# EAGLE board Proiect TSC v103 (EAGLE 9.7.0)
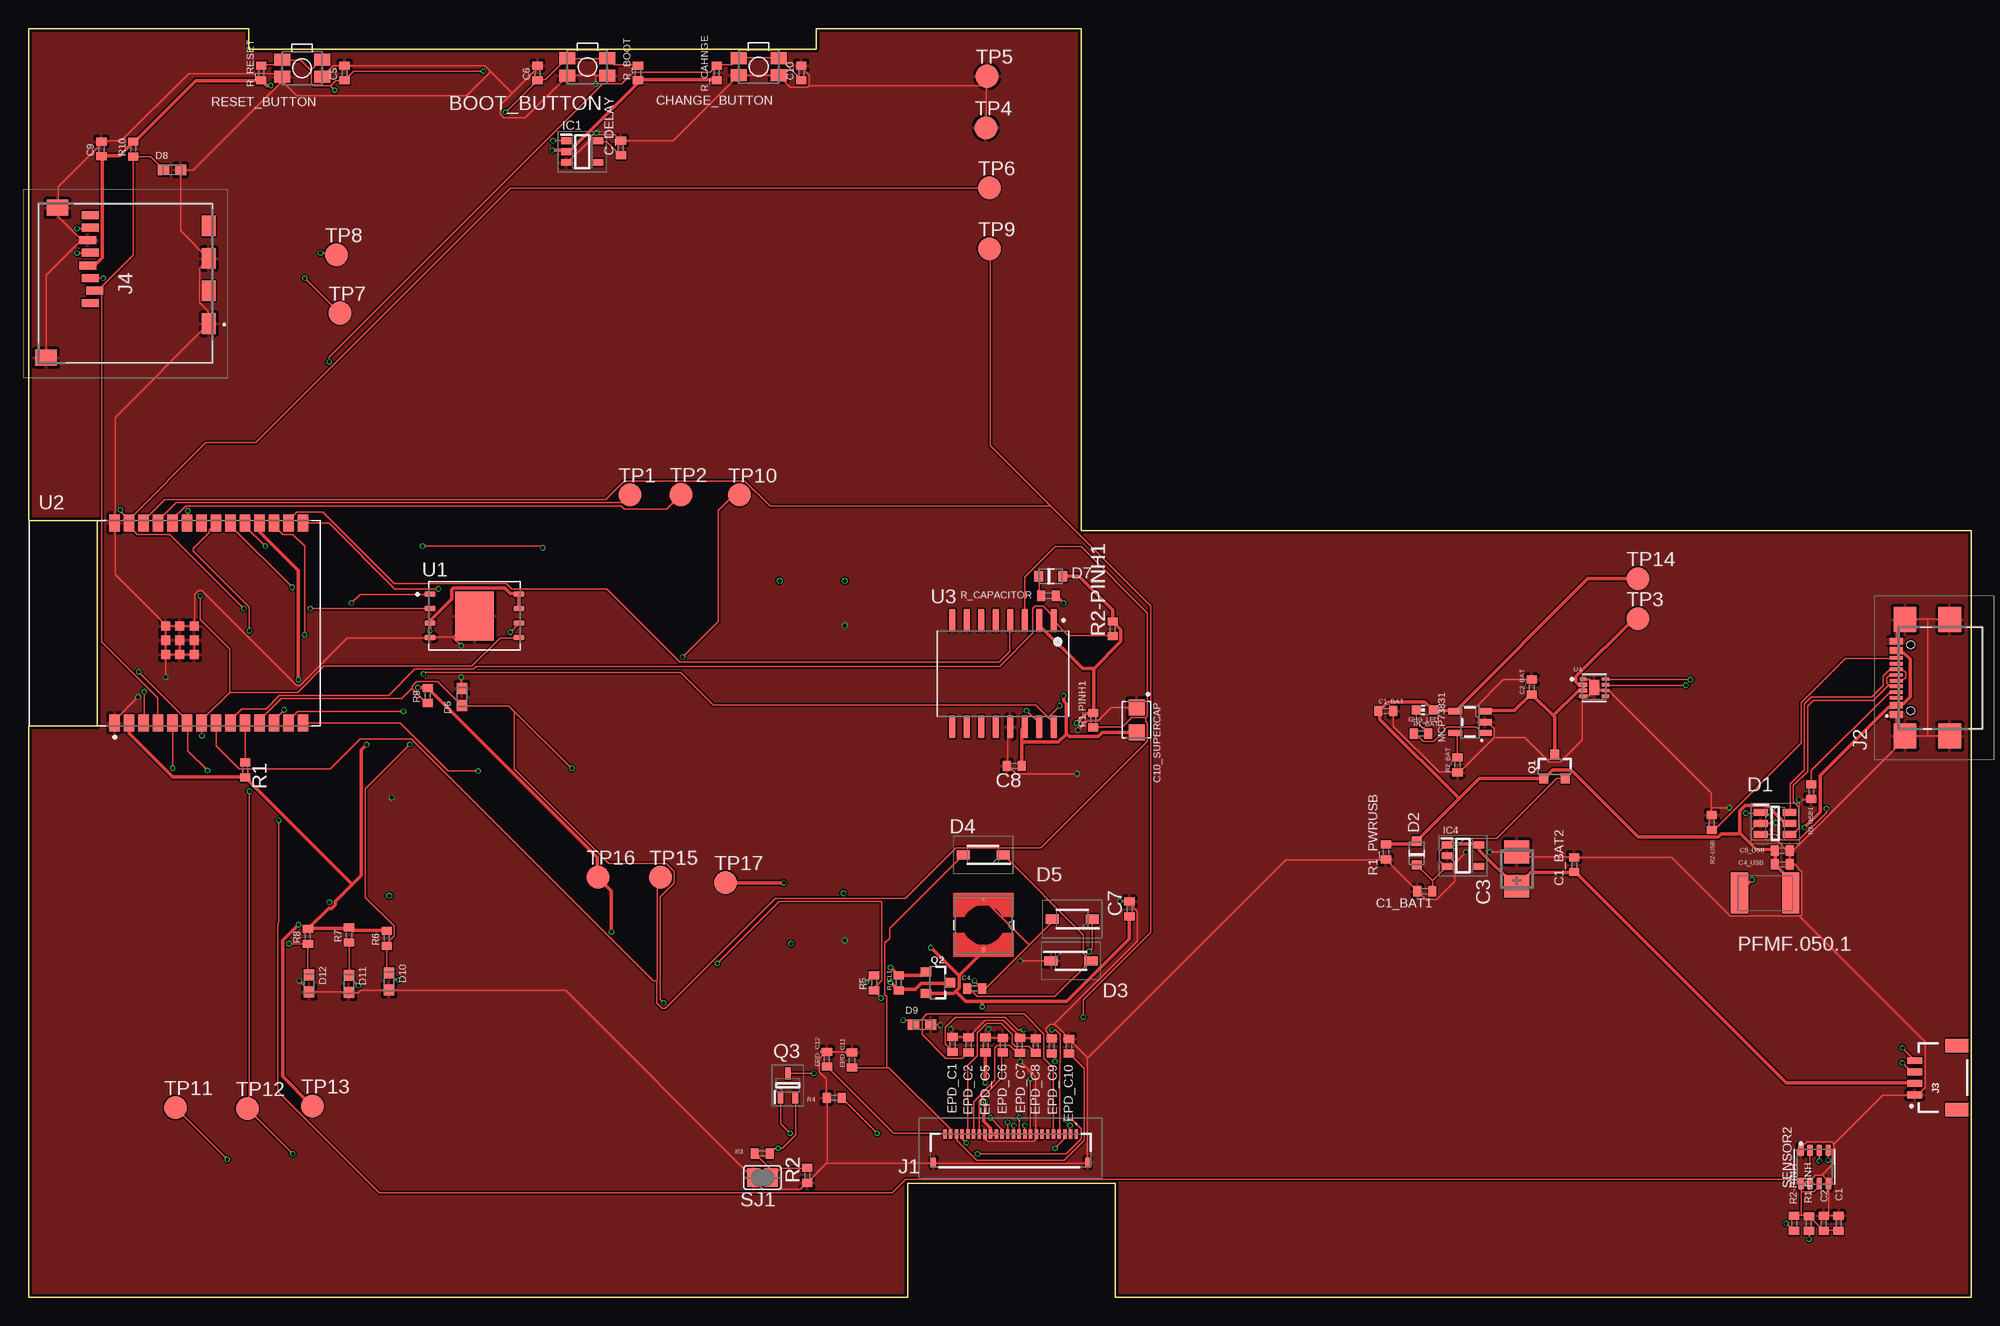
[diagram p0: board, top side]
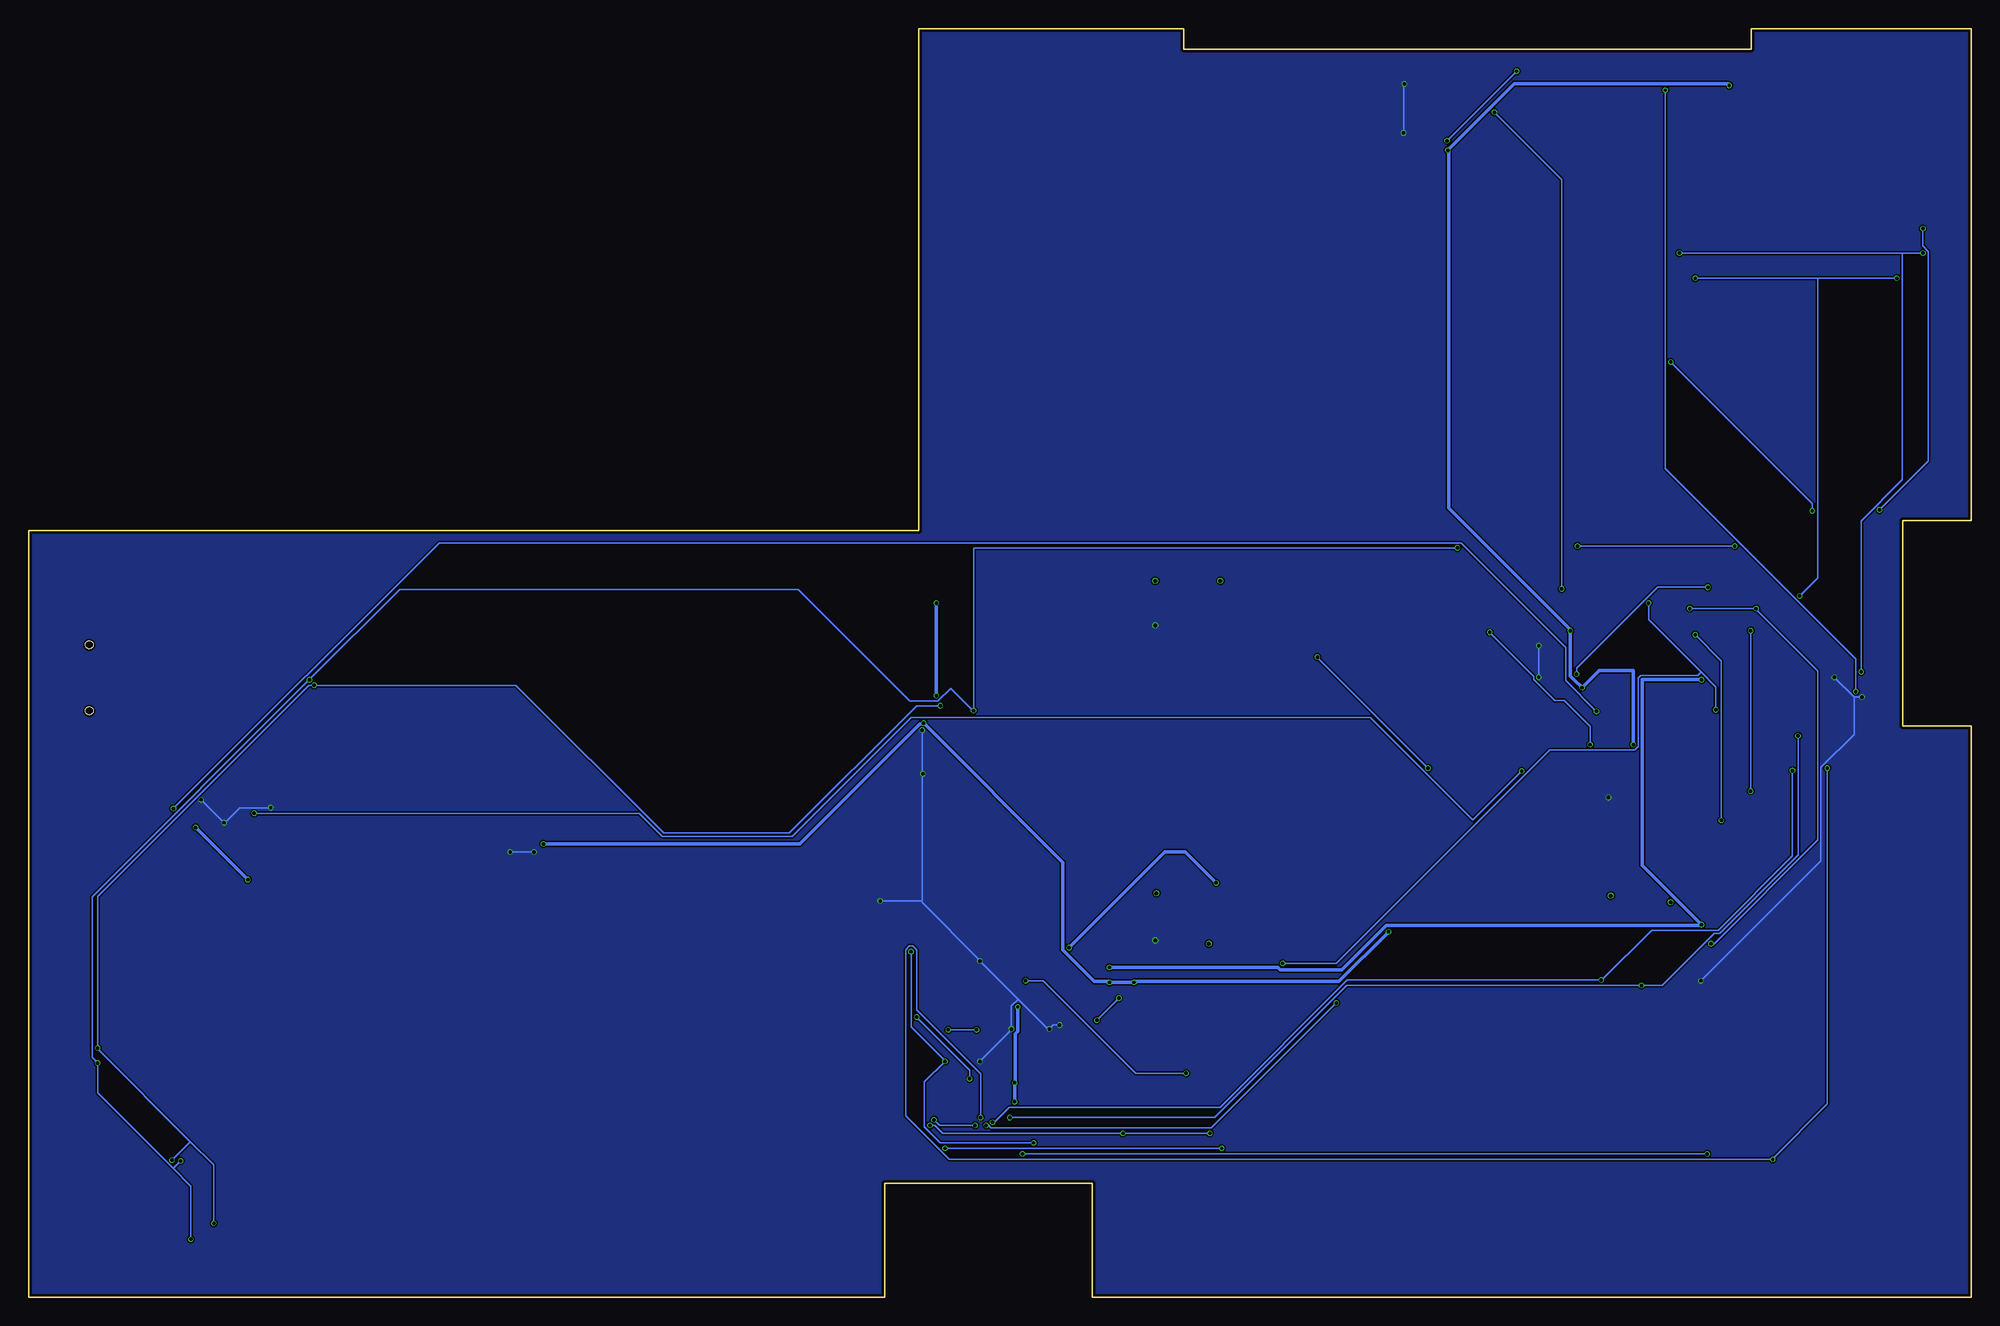
[diagram p1: board, bottom side, seen from below]

Size 170.2 x 111.2 mm. Coordinates in mm from the lower left corner, seen from the top.
Outline: 92.2,111.2 92.2,67.2 170.2,67.2 170.2,0 95.2,0 95.2,10 77,10 77,0 0,0 0,50.1 6,50.1 6,68.1 0,68.1 0,111.2 19.3,111.2 19.3,109.4 69,109.4 69,111.2 92.2,111.2
Copper layers (1*16): Top 0.035mm / dielectric 1.6mm / Bottom 0.035mm
Design rules "jlcpcb-2layers.dru": minimum track width 5mil, minimum drill 0.3mm, track to track 5mil, track to pad 5mil, pad to pad 5mil, via to via 5mil, smd to smd 5mil, copper to edge 0.2mm, drill to drill 6mil, minimum pad ring 10mil, minimum via ring 3mil, stop-mask expansion 4mil, vias tented up to drill 0mil, thermal gap 10mil
Net classes: 0 default: width 0.15 mm; 1 power: width 0.3 mm

## Footprints (pad centres in the part's own frame; a part is rotated, then mirrored left to right if it is on the bottom)
MYBUTTON = smd 1.4 x 1.05: 1 1.75,0.75; 2 -1.75,0.75; 3 -1.75,-0.75; 4 1.75,-0.75
EAGLE-LTSPICE_C0402 = smd 0.7 x 0.9: 1 -0.65,0; 2 0.65,0
ESP32_WROVER_EAGLE-LTSPICE_C0402 = smd 0.7 x 0.9: 1 -0.65,0; 2 0.65,0
RCL_CT3528 = smd 2 x 2.2: + -1.5,0; - 1.5,0
CAPCP3225X100N = smd 1.4 x 1.4: 1 -1.1,0; 2 1.1,0
SOT95P280X145-6N = smd 1.2 x 0.6: 1 -1.25,0.95; 2 -1.25,0; 3 -1.25,-0.95; 4 1.25,-0.95; 5 1.25,0; 6 1.25,0.95
ESP32_WROVER_AVX---SD0805S020S1R0_AVX_SD0805S020S1R0_0 = smd 0.8 x 0.9: 1 -1.05,0; 2 1.05,0
SOD3716X135N = smd 1.15 x 0.8: 1 -1.75,0; 2 1.75,0
DIOC1608X36N = smd 0.97 x 0.94: 1 -0.75,0; 2 0.75,0
ADAFRUIT_CHIP-LED0603 = smd 0.8 x 0.8: A 0,-0.75; C 0,0.75
SOT95P280X125-5N = smd 0.9 x 0.6: 1 -1.4,0.95; 2 -1.4,0; 3 -1.4,-0.95; 4 1.4,-0.95; 5 1.4,0.95
SOT95P280X120-5N = smd 0.9 x 0.6: 1 -1.4,0.95; 2 -1.4,0; 3 -1.4,-0.95; 4 1.4,-0.95; 5 1.4,0.95
FH34SRJ24S05SH99 = smd 0.3 x 0.8: 1 5.75,1.45; 2 5.25,1.45; 3 4.75,1.45; 4 4.25,1.45; 5 3.75,1.45; 6 3.25,1.45; 7 2.75,1.45; 8 2.25,1.45; 9 1.75,1.45; 10 1.25,1.45; 11 0.75,1.45; 12 0.25,1.45; 13 -0.25,1.45; 14 -0.75,1.45; 15 -1.25,1.45; 16 -1.75,1.45; 17 -2.25,1.45; 18 -2.75,1.45; 19 -3.25,1.45; 20 -3.75,1.45; 21 -4.25,1.45; 22 -4.75,1.45; 23 -5.25,1.45; 24 -5.75,1.45 | smd 0.4 x 0.8: MP1 6.75,-1.05; MP2 -6.75,-1.05
SAMACSYS_PARTS_USB4110GFA = smd 0.3 x 1.15: A1 -3.35,3.878; A4 -2.55,3.878; A5 -1.25,3.878; A6 -0.25,3.878; A7 0.25,3.878; A8 1.25,3.878; A9 2.55,3.878; A12 3.35,3.878; B1 3.05,3.878; B4 2.25,3.878; B5 1.75,3.878; B6 0.75,3.878; B7 -0.75,3.878; B8 -1.75,3.878; B9 -2.25,3.878; B12 -3.05,3.878 | smd 2.18 x 2: MP1 -5.11,-0.827; MP2 5.11,-0.827; MP3 -5.11,3.103; MP4 5.11,3.103 | hole 0.65: -2.89,2.603; 2.89,2.603
JST04_1MM_RA = smd 0.6 x 1.35: 1 -1.5,0; 2 -0.5,0; 3 0.5,0; 4 1.5,0 | smd 1.2 x 2: NC1 2.8,-3.675; NC2 -2.8,-3.675
112ATAARR03ATTEND = smd 1.8 x 1.2: G1 10.6,10.4; G2 4.9,10.4; S1 7.75,10.4; S2 2.05,10.4 | smd 1.4 x 1.9: G3 13.6,-3.85; G4 0.45,-2.85 | smd 0.7 x 1.5: P1 8.8,0; P2 7.7,0.4; P3 6.6,0; P4 5.5,-0.2; P5 4.4,0; P6 3.3,-0.2; P7 2.2,0; P8 1.1,0
IND_4828-WE-TPC_WRE = smd 0.254 x 0.152: 1 -2.286,0 | smd 0.61 x 0.305: 2 2.286,0
ESP32_WROVER_SPARKFUN-IC-POWER_SOT23-5 = smd 0.55 x 1.2: 1 -0.95,-1.3; 2 0,-1.3; 3 0.95,-1.3; 4 0.95,1.3; 5 -0.95,1.3
ESP32C6_VARISTOR_CT/CN1812 = smd 1.5 x 3.6: 1 -2.25,0; 2 2.25,0
ESP32_WROVER_SPARKFUN-DISCRETESEMI_SOT23-3 = smd 0.8 x 0.9: 1 -0.95,-1; 2 0.95,-1; 3 0,1.1
SOT65P210X110-3N = smd 1.05 x 0.5: 1 -1.05,0.65; 2 -1.05,-0.65; 3 1.05,0
ESP32_WROVER_EAGLE-LTSPICE_R0402 = smd 0.7 x 0.9: 1 -0.65,0; 2 0.65,0
ESP32_WROVER_BME680_PSON80P300X300X100-8N = smd 1.016 x 0.5: 1 1.458,1.2; 2 1.458,0.4; 3 1.458,-0.4; 4 1.458,-1.2; 5 -1.458,-1.22; 6 -1.458,-0.4; 7 -1.458,0.4; 8 -1.458,1.2
SJ = smd 1.168 x 1.6: 1 -0.762,0; 2 0.762,0
TP20R = smd 2 x 2: TP 0,0
SON127P600X800X80-9N = smd 0.94 x 0.44: 1 -3.895,1.905; 2 -3.895,0.635; 3 -3.895,-0.635; 4 -3.895,-1.905; 5 3.895,-1.905; 6 3.895,-0.635; 7 3.895,0.635; 8 3.895,1.905 | smd 3.4 x 4.3: 9 0,0
XCVR_ESP32-C6-WROOM-1-N8 = smd 1.5 x 0.9: 1 -8.75,5.26; 2 -8.75,3.99; 3 -8.75,2.72; 4 -8.75,1.45; 5 -8.75,0.18; 6 -8.75,-1.09; 7 -8.75,-2.36; 8 -8.75,-3.63; 9 -8.75,-4.9; 10 -8.75,-6.17; 11 -8.75,-7.44; 12 -8.75,-8.71; 13 -8.75,-9.98; 14 -8.75,-11.25; 15 8.75,-11.25; 16 8.75,-9.98; 17 8.75,-8.71; 18 8.75,-7.44; 19 8.75,-6.17; 20 8.75,-4.9; 21 8.75,-3.63; 22 8.75,-2.36; 23 8.75,-1.09; 24 8.75,0.18; 25 8.75,1.45; 26 8.75,2.72; 27 8.75,3.99; 28 8.75,5.26 | smd 0.8 x 0.8: 29_1 -2.755,0.79; 29_2 -1.505,0.79; 29_3 -0.255,0.79; 29_4 -2.755,-0.46; 29_5 -1.505,-0.46; 29_6 -0.255,-0.46; 29_7 -2.755,-1.71; 29_8 -1.505,-1.71; 29_9 -0.255,-1.71
SOIC127P1032X265-16N = smd 2.05 x 0.59: 1 -4.655,4.445; 2 -4.655,3.175; 3 -4.655,1.905; 4 -4.655,0.635; 5 -4.655,-0.635; 6 -4.655,-1.905; 7 -4.655,-3.175; 8 -4.655,-4.445; 9 4.655,-4.445; 10 4.655,-3.175; 11 4.655,-1.905; 12 4.655,-0.635; 13 4.655,0.635; 14 4.655,1.905; 15 4.655,3.175; 16 4.655,4.445
SON50P200X200X80-9N = smd 0.61 x 0.305: 1 -0.985,0.75 | smd 0.813 x 0.406: 2 -0.985,0.25; 3 -0.985,-0.25 | smd 0.76 x 0.27: 4 -0.985,-0.75; 5 0.985,-0.75; 6 0.985,-0.25; 7 0.985,0.25; 8 0.985,0.75 | smd 0.9 x 1.3: 9 0,0

## Placement (x,y rotation side)
BOOT_BUTTON  BUTTON_CUSYOMV1  [MYBUTTON]  48.96,107.83 180 top
C1  100nF  [EAGLE-LTSPICE_C0402]  158.56,6.5 90 top
C1_BAT  4.7uF  [ESP32_WROVER_EAGLE-LTSPICE_C0402]  118.9,51.4 0 top
C1_BAT1  4.7uF  [EAGLE-LTSPICE_C0402]  122.31,35.6 180 top
C1_BAT2  4.7uF  [EAGLE-LTSPICE_C0402]  135.41,37.93 90 top
C2  100nF  [EAGLE-LTSPICE_C0402]  157.26,6.49 90 top
C2_BAT  4.7uF  [ESP32_WROVER_EAGLE-LTSPICE_C0402]  131.68,53.49 90 top
C3  100uF TANT  [RCL_CT3528]  130.38,37.55 90 top
C4  4.7uF/25V  [ESP32_WROVER_EAGLE-LTSPICE_C0402]  82.88,27.07 0 top
C4_USB  100nF  [ESP32_WROVER_EAGLE-LTSPICE_C0402]  153.62,37.96 0 top
C5  1uF  [ESP32_WROVER_EAGLE-LTSPICE_C0402]  27.69,107.31 90 top
C5_USB  4.7uF  [ESP32_WROVER_EAGLE-LTSPICE_C0402]  153.62,39.15 0 top
C6  100nF  [ESP32_WROVER_EAGLE-LTSPICE_C0402]  44.59,107.31 90 top
C7  10uF  [EAGLE-LTSPICE_C0402]  96.45,34.05 90 top
C8  100nF  [ESP32_WROVER_EAGLE-LTSPICE_C0402]  86.35,46.58 180 top
C9  100nF  [EAGLE-LTSPICE_C0402]  6.39,100.65 90 top
C10  100nF  [ESP32_WROVER_EAGLE-LTSPICE_C0402]  67.69,107.31 90 top
C10_SUPERCAP  CPH3225A  [CAPCP3225X100N]  97.07,50.62 270 top
C_DELAY  100nF  [EAGLE-LTSPICE_C0402]  51.89,100.73 90 top
CHANGE_BUTTON  BUTTON_CUSYOMV1  [MYBUTTON]  63.96,107.85 180 top
D1  USBLC6-2SC6Y  [SOT95P280X145-6N]  153,41.54 0 top
D2  ESP32_WROVER_AVX---SD0805S020S1R0_AVX_SD0805S020S1R0_0_0AVX_SD0805S020S1R0_0_0  [ESP32_WROVER_AVX---SD0805S020S1R0_AVX_SD0805S020S1R0_0]  121.61,38.94 90 top
D3  MBR0530  [SOD3716X135N]  91.32,29.49 0 top
D4  MBR0530  [SOD3716X135N]  83.62,38.77 180 top
D5  MBR0530  [SOD3716X135N]  91.42,33.15 180 top
D6  PGB1010603MR  [DIOC1608X36N]  37.97,52.62 90 top
D7  ESP32_WROVER_AVX---SD0805S020S1R0_AVX_SD0805S020S1R0_0_0AVX_SD0805S020S1R0_0_0  [ESP32_WROVER_AVX---SD0805S020S1R0_AVX_SD0805S020S1R0_0]  89.55,63.2 0 top
D8  PGB1010603MR  [DIOC1608X36N]  12.57,98.81 0 top
D9  PGB1010603MR  [DIOC1608X36N]  78.27,23.9 0 top
D10  PGB1010603MR  [DIOC1608X36N]  31.57,27.69 270 top
D11  PGB1010603MR  [DIOC1608X36N]  28.07,27.48 270 top
D12  PGB1010603MR  [DIOC1608X36N]  24.57,27.53 270 top
EPD_C1  1uF/50V  [EAGLE-LTSPICE_C0402]  80.94,22.17 90 top
EPD_C2  1uF/50V  [EAGLE-LTSPICE_C0402]  82.34,22.15 90 top
EPD_C5  0.1uF/50V  [EAGLE-LTSPICE_C0402]  83.84,22.13 90 top
EPD_C6  1uF/50V  [EAGLE-LTSPICE_C0402]  85.34,22.11 90 top
EPD_C7  1uF/50V  [EAGLE-LTSPICE_C0402]  86.84,22.09 90 top
EPD_C8  1uF/50V  [EAGLE-LTSPICE_C0402]  88.24,22.07 90 top
EPD_C9  1uF/50V  [EAGLE-LTSPICE_C0402]  89.64,22.05 90 top
EPD_C10  1uF/50V  [EAGLE-LTSPICE_C0402]  91.14,22.03 90 top
EPD_C11  1uF/50V  [EAGLE-LTSPICE_C0402]  72.14,20.81 90 top
EPD_C12  1uF/50v  [EAGLE-LTSPICE_C0402]  69.94,20.89 90 top
GHG_LED  [ADAFRUIT_CHIP-LED0603]  122.3,51.48 90 top
IC1  BD5229G-TR  [SOT95P280X125-5N]  48.5,100.41 0 top
IC4  XC6220A331MR-G  [SOT95P280X120-5N]  125.66,38.71 0 top
J1  FH34SRJ-24S-0.5SH_99_  [FH34SRJ24S05SH99]  86.03,12.87 0 top
J2  SAMACSYS_PARTS_USB4110-GF-A  [SAMACSYS_PARTS_USB4110GFA]  167.48,54.3 90 top
J3  QWIIC_RIGHT_ANGLE  [JST04_1MM_RA]  165.23,19.26 90 top
J4  112A-TAAR-R03_ATTEND  [112ATAARR03ATTEND]  5.39,95.94 270 top
L1  68uH  [IND_4828-WE-TPC_WRE]  83.66,32.64 270 top
MCP73831  ESP32_WROVER_SPARKFUN-IC-POWER_MCP73831  [ESP32_WROVER_SPARKFUN-IC-POWER_SOT23-5]  126.28,50.42 90 top
PFMF.050.1  ESP32C6_VARISTORCN1812  [ESP32C6_VARISTOR_CT/CN1812]  152.13,35.44 0 top
Q1  20V/4.2A/52mΩ/1.4W  [ESP32_WROVER_SPARKFUN-DISCRETESEMI_SOT23-3]  133.68,46.49 0 top
Q2  20V/4.2A/52mΩ/1.4W  [ESP32_WROVER_SPARKFUN-DISCRETESEMI_SOT23-3]  79.61,27.59 270 top
Q3  SI1308EDL-T1-GE3  [SOT65P210X110-3N]  66.52,18.58 90 top
R1  10k  [ESP32_WROVER_EAGLE-LTSPICE_R0402]  18.98,46.22 270 top
R1-PINH  10K  [ESP32_WROVER_EAGLE-LTSPICE_R0402]  155.96,6.48 90 top
R1-PINH1  10K  [ESP32_WROVER_EAGLE-LTSPICE_R0402]  93.27,50.59 90 top
R1_BAT  200  [ESP32_WROVER_EAGLE-LTSPICE_R0402]  121.98,49.41 0 top
R1_PWRUSB  100k  [ESP32_WROVER_EAGLE-LTSPICE_R0402]  118.91,39.03 90 top
R2  2.2  [ESP32_WROVER_EAGLE-LTSPICE_R0402]  68.22,10.69 90 top
R2-PINH  10K  [ESP32_WROVER_EAGLE-LTSPICE_R0402]  154.66,6.49 90 top
R2-PINH1  10K  [ESP32_WROVER_EAGLE-LTSPICE_R0402]  94.97,58.6 90 top
R2-USB  5k1  [ESP32_WROVER_EAGLE-LTSPICE_R0402]  147.45,41.63 90 top
R2-USB1  5k1  [ESP32_WROVER_EAGLE-LTSPICE_R0402]  156.16,44.32 90 top
R2_BAT  2k  [ESP32_WROVER_EAGLE-LTSPICE_R0402]  125.18,46.67 90 top
R3  0.47  [ESP32_WROVER_EAGLE-LTSPICE_R0402]  64.27,12.62 180 top
R4  10K  [ESP32_WROVER_EAGLE-LTSPICE_R0402]  70.57,17.5 180 top
R5  10K  [ESP32_WROVER_EAGLE-LTSPICE_R0402]  74.07,27.58 90 top
R6  10K  [ESP32_WROVER_EAGLE-LTSPICE_R0402]  31.37,31.47 90 top
R7  10K  [ESP32_WROVER_EAGLE-LTSPICE_R0402]  28.07,31.76 90 top
R8  10K  [ESP32_WROVER_EAGLE-LTSPICE_R0402]  24.47,31.65 90 top
R9  10K  [ESP32_WROVER_EAGLE-LTSPICE_R0402]  34.97,52.74 90 top
R10  10K  [ESP32_WROVER_EAGLE-LTSPICE_R0402]  9.17,100.63 90 top
R_BOOT  10k  [ESP32_WROVER_EAGLE-LTSPICE_R0402]  53.39,107.31 90 top
R_CAHNGE  10k  [ESP32_WROVER_EAGLE-LTSPICE_R0402]  60.29,107.31 90 top
R_CAPACITOR  15  [ESP32_WROVER_EAGLE-LTSPICE_R0402]  89.35,61.49 0 top
R_CL1  10k  [ESP32_WROVER_EAGLE-LTSPICE_R0402]  76.24,27.57 90 top
R_RESET  10k  [ESP32_WROVER_EAGLE-LTSPICE_R0402]  20.39,107.31 90 top
RESET_BUTTON  BUTTON_CUSYOMV1  [MYBUTTON]  23.96,107.73 180 top
SENSOR2  ESP32_WROVER_BME680_BME680  [ESP32_WROVER_BME680_PSON80P300X300X100-8N]  156.46,11.44 90 top
SJ1  [SJ]  64.29,10.5 0 top
TP1  TPTP20R  [TP20R]  52.67,70.34 0 top
TP2  TPTP20R  [TP20R]  57.17,70.36 0 top
TP3  TPTP20R  [TP20R]  140.97,59.48 0 top
TP4  TPTP20R  [TP20R]  83.87,102.5 0 top
TP5  TPTP20R  [TP20R]  83.97,107.02 0 top
TP6  TPTP20R  [TP20R]  84.17,97.24 0 top
TP7  TPTP20R  [TP20R]  27.27,86.26 0 top
TP8  TPTP20R  [TP20R]  26.97,91.38 0 top
TP9  TPTP20R  [TP20R]  84.17,91.9 0 top
TP10  TPTP20R  [TP20R]  62.27,70.32 0 top
TP11  TPTP20R  [TP20R]  12.87,16.64 0 top
TP12  TPTP20R  [TP20R]  19.17,16.56 0 top
TP13  TPTP20R  [TP20R]  24.87,16.78 0 top
TP14  TPTP20R  [TP20R]  140.97,63 0 top
TP15  TPTP20R  [TP20R]  55.37,36.82 0 top
TP16  TPTP20R  [TP20R]  49.87,36.84 0 top
TP17  TPTP20R  [TP20R]  61.07,36.36 0 top
U1  W25Q512JVEIQ  [SON127P600X800X80-9N]  39.07,59.73 0 top
U2  ESP32-C6-WROOM-1-N8  [XCVR_ESP32-C6-WROOM-1-N8]  12.8,59.1 90 top
U3  DS3231SN#  [SOIC127P1032X265-16N]  85.36,54.66 270 top
U4  MAX17048G+T10  [SON50P200X200X80-9N]  137.16,53.44 0 top

## Library data of the parts
BOOT_BUTTON CHANGE_BUTTON GHG_LED PFMF.050.1 RESET_BUTTON SJ1 TP1-TP17 = DeskAssistant v19 v1
C1 C1_BAT C1_BAT1 C1_BAT2 C2 C2_BAT C4 C4_USB C5 C5_USB C6-C10 C_DELAY EPD_C1 EPD_C2 EPD_C5-EPD_C12 = DeskAssistant v19 v1; SPICEMODEL: NONE; SPICEPREFIX: C
C3 = DeskAssistant v19 v1; SPICEPREFIX: C
C10_SUPERCAP = DeskAssistant v19 v1; AVAILABILITY: Not in stock; CHECK_PRICES: https://www.snapeda.com/parts/CPH3225A/Seiko+Instruments/view-part/?ref=eda; DESCRIPTION: 11 mF (EDLC) Supercapacitor 3.3 V 1210 (3225 Metric) - -; MF: Seiko Instruments; MP: CPH3225A; PACKAGE: 1210 Seiko; PRICE: None; PURCHASE-URL: https://www.snapeda.com/api/url_track_click_mouser/?unipart_id=562593&manufacturer=Seiko Instruments&part_name=CPH3225A&search_term=None; SNAPEDA_LINK: https://www.snapeda.com/parts/CPH3225A/Seiko+Instruments/view-part/?ref=snap
D1 = DeskAssistant v19 v1; AVAILABILITY: In Stock; CHECK_PRICES: https://www.snapeda.com/parts/USBLC6-2SC6Y/STMicroelectronics/view-part/?ref=eda; DESCRIPTION: 17V Clamp 5A (8/20µs) Ipp Tvs Diode Surface Mount SOT-23-6; MF: STMicroelectronics; MP: USBLC6-2SC6Y; PACKAGE: SOT-23-6 STMicroelectronics; PRICE: None; SNAPEDA_LINK: https://www.snapeda.com/parts/USBLC6-2SC6Y/STMicroelectronics/view-part/?ref=snap
D2 D7 = DeskAssistant v19 v1; CENTROID_NOT_SPECIFIED: No; DATASHEET: http://datasheets.avx.com/schottky.pdf; DIGIKEY_DESCRIPTION: DIODE SCHOTTKY 20V 1A 0805; DIGIKEY_PART_NUMBER: 478-7800-1-ND; LEAD_FREE: yes; MF: AVX; MOUSER_PART_NUMBER: 581-SD0805S020S1R0; PACKAGE: 0805 (2012 metric); PREFIX: D; ROHS: yes; TEMPERATURE_RANGE_HIGH: +125°C; TEMPERATURE_RANGE_LOW: -55°C
D3-D5 = DeskAssistant v19 v1; AVAILABILITY: In Stock; CHECK_PRICES: https://www.snapeda.com/parts/MBR0530/Onsemi/view-part/?ref=eda; DESCRIPTION: Diode Schottky 30 V 500mA Surface Mount SOD-123; MF: ON Semiconductor; MP: MBR0530; PACKAGE: SOD-123-2 ON Semiconductor; PRICE: None; PURCHASE-URL: https://www.snapeda.com/api/url_track_click_mouser/?unipart_id=179458&manufacturer=ON Semiconductor&part_name=MBR0530&search_term=None; SNAPEDA_LINK: https://www.snapeda.com/parts/MBR0530/Onsemi/view-part/?ref=snap
D6 D8-D12 = DeskAssistant v19 v1; AVAILABILITY: In Stock; CHECK_PRICES: https://www.snapeda.com/parts/PGB1010603MR/Littelfuse/view-part/?ref=eda; DESCRIPTION: 150V (Typ) Clamp - Ipp Tvs Diode Surface Mount 0603 (1608 Metric); MF: Littelfuse Inc.; MP: PGB1010603MR; PACKAGE: 0603 Littelfuse Inc.; PRICE: None; PURCHASE-URL: https://www.snapeda.com/api/url_track_click_mouser/?unipart_id=5659453&manufacturer=Littelfuse Inc.&part_name=PGB1010603MR&search_term=None; SNAPEDA_LINK: https://www.snapeda.com/parts/PGB1010603MR/Littelfuse/view-part/?ref=snap
IC1 = DeskAssistant v19 v1; DESCRIPTION: Voltage Detector with Adjustable Delay Time: CMOS processes are utilized to develop high precision, low current consumption CMOS reset ICs that allow arbitrary setting of the delay time. The extensive lineup includes both Nch Open Drain and CMOS output types in a wide range of detection voltages (from 2.3V to 6.0V, in 0.1V steps), enabling selection of the ideal solution based on customer requirements. In addition, the entire series is of course both lead-free and RoHS-compliant.; HEIGHT: 1.25mm; MANUFACTURER_NAME: ROHM Semiconductor; MANUFACTURER_PART_NUMBER: BD5229G-TR; MOUSER_PART_NUMBER: 755-BD5229G-TR; MOUSER_PRICE-STOCK: https://www.mouser.co.uk/ProductDetail/ROHM-Semiconductor/BD5229G-TR?qs=4kLU8WoGk0vvnhrrYwdszw%3D%3D
IC4 = DeskAssistant v19 v1; DESCRIPTION: LDO Voltage Regulators; HEIGHT: 1.2mm; MANUFACTURER_NAME: Torex; MANUFACTURER_PART_NUMBER: XC6220A331MR-G; MOUSER_PART_NUMBER: 865-XC6220A331MR-G; MOUSER_PRICE-STOCK: https://www.mouser.co.uk/ProductDetail/Torex-Semiconductor/XC6220A331MR-G?qs=AsjdqWjXhJ8ZSWznL1J0gg%3D%3D
J1 = DeskAssistant v19 v1; DESCRIPTION: 24 Position FFC, FPC Connector Contacts, Top and Bottom 0.020" (0.50mm) Surface Mount, Right Angle; HEIGHT: 1.1mm; MANUFACTURER_NAME: Hirose; MANUFACTURER_PART_NUMBER: FH34SRJ-24S-0.5SH(99); MOUSER_PART_NUMBER: 798-FH34SRJ24S05SH99; MOUSER_PRICE-STOCK: https://www.mouser.co.uk/ProductDetail/Hirose-Connector/FH34SRJ-24S-0.5SH99?qs=vcbW%252B4%252BSTIpKBl5ap9J8Fw%3D%3D
J2 = DeskAssistant v19 v1; DESCRIPTION: CONN USB 2.0 TYPE-C R/A SMT; HEIGHT: 3.26mm; MANUFACTURER_NAME: GCT (GLOBAL CONNECTOR TECHNOLOGY); MANUFACTURER_PART_NUMBER: USB4110-GF-A; MOUSER_PART_NUMBER: 640-USB4110-GF-A; MOUSER_PRICE-STOCK: https://www.mouser.co.uk/ProductDetail/GCT/USB4110-GF-A?qs=KUoIvG%2F9IlYiZvIXQjyJeA%3D%3D
J3 = DeskAssistant v19 v1; PROD_ID: CONN-13694
J4 = DeskAssistant v19 v1; DESCRIPTION: Micro SD Card Socket, Push-Push Type, Top Mount, SMT, H=1.83mm, 10u; HEIGHT: 1.9mm; MANUFACTURER_NAME: ATTEND; MANUFACTURER_PART_NUMBER: 112A-TAAR-R03 ATTEND
L1 = DeskAssistant v19 v1; COPYRIGHT: Copyright (C) 2024 Ultra Librarian. All rights reserved.; MANUFACTURER_PART_NUMBER: 744043680; MFR_NAME: Wurth Electronics
MCP73831 = DeskAssistant v19 v1; PROD_ID: IC-09995
Q1 Q2 = DeskAssistant v19 v1; PROD_ID: TRAN-14388
Q3 = DeskAssistant v19 v1; AVAILABILITY: In Stock; CHECK_PRICES: https://www.snapeda.com/parts/SI1308EDL-T1-GE3/Vishay+Siliconix/view-part/?ref=eda; DESCRIPTION: Si1308EDL-T1-GE3 N-channel MOSFET Transistor, 1.5 A, 30 V, 3-Pin SC-70 | Siliconix / Vishay SI1308EDL-T1-GE3; MF: Vishay Siliconix; MP: SI1308EDL-T1-GE3; PACKAGE: SOT-323 Vishay Semiconductor; PRICE: None; PURCHASE-URL: https://www.snapeda.com/api/url_track_click_mouser/?unipart_id=274603&manufacturer=Vishay Siliconix&part_name=SI1308EDL-T1-GE3&search_term=None; SNAPEDA_LINK: https://www.snapeda.com/parts/SI1308EDL-T1-GE3/Vishay+Siliconix/view-part/?ref=snap
R1 R1-PINH R1-PINH1 R1_BAT R1_PWRUSB R2 R2-PINH R2-PINH1 R2-USB R2-USB1 R2_BAT R3-R10 R_BOOT R_CAHNGE R_CAPACITOR R_CL1 R_RESET = DeskAssistant v19 v1; SPICEMODEL: NONE; SPICEPREFIX: R
SENSOR2 = DeskAssistant v19 v1; AVAILABILITY: Unavailable; DESCRIPTION: Integrated Environmental Unit; MF: Bosch Sensortec; MP: BME680; PACKAGE: LGA-8 Bosch Tools; PRICE: None
U1 = DeskAssistant v19 v1; AVAILABILITY: In Stock; CHECK_PRICES: https://www.snapeda.com/parts/W25Q512JVEIQ/Winbond+Electronics/view-part/?ref=eda; DESCRIPTION: FLASH - NOR Memory IC 512Mb (64M x 8) SPI - Quad I/O 133 MHz 8-WSON (8x6); MF: Winbond Electronics; MP: W25Q512JVEIQ; PACKAGE: Package; PRICE: None; SNAPEDA_LINK: https://www.snapeda.com/parts/W25Q512JVEIQ/Winbond+Electronics/view-part/?ref=snap
U2 = DeskAssistant v19 v1; AVAILABILITY: In Stock; CHECK_PRICES: https://www.snapeda.com/parts/ESP32-C6-WROOM-1-N8/Espressif+Systems/view-part/?ref=eda; DESCRIPTION: Multiprotocol Modules ESP32-C6 module, Wi-Fi 6 in 2.4 GHz band, Bluetooth 5, Zigbee 3.0 and Thread. ESP34-WROOM Compatible - ENGINEERING SAMPLE; MF: Espressif Systems; MP: ESP32-C6-WROOM-1-N8; PACKAGE: None; PRICE: None; SNAPEDA_LINK: https://www.snapeda.com/parts/ESP32-C6-WROOM-1-N8/Espressif+Systems/view-part/?ref=snap
U3 = DeskAssistant v19 v1; AVAILABILITY: In Stock; CHECK_PRICES: https://www.snapeda.com/parts/DS3231SN%23/Analog+Devices/view-part/?ref=eda; DESCRIPTION: Extremely Accurate I²C-Integrated RTC/TCXO/Crystal; MF: Analog Devices; MP: DS3231SN#; PACKAGE: SOIC-16 Maxim; PRICE: None; PURCHASE-URL: https://www.snapeda.com/api/url_track_click_mouser/?unipart_id=99048&manufacturer=Analog Devices&part_name=DS3231SN#&search_term=None; SNAPEDA_LINK: https://www.snapeda.com/parts/DS3231SN%23/Analog+Devices/view-part/?ref=snap
U4 = DeskAssistant v19 v1; AVAILABILITY: In Stock; CHECK_PRICES: https://www.snapeda.com/parts/MAX17048G+T10/Analog+Devices/view-part/?ref=eda; DESCRIPTION: 3µA 1-Cell/2-Cell Fuel Gauge with ModelGauge; MF: Analog Devices; MP: MAX17048G+T10; PACKAGE: TDFN-8 Maxim; PRICE: None; PURCHASE-URL: https://www.snapeda.com/api/url_track_click_mouser/?unipart_id=329239&manufacturer=Analog Devices&part_name=MAX17048G+T10&search_term=None; SNAPEDA_LINK: https://www.snapeda.com/parts/MAX17048G+T10/Analog+Devices/view-part/?ref=snap

## Nets
3V3 [power]: C1_BAT2.1 C3.+ C9.1 D7.2 IC1.2 IC4.5 J3.2 J4.P4 Q2.3 R1-PINH1.2 R1.2 R2-PINH1.2 R5.2 R6.2 R7.2 R8.2 R9.2 R10.2 R_BOOT.1 R_CAHNGE.1 R_CL1.1 R_RESET.1 TP16.TP U1.3 U1.7 U1.8 U2.2 U3.2
32KHZ: R2-PINH1.1 U2.9 U3.1
DN: D1.4 J2.A7 J2.B7
DP: D1.6 J2.A6 J2.B6
EPD_3V3 [power]: C7.1 EPD_C5.1 J1.15 J1.16 L1.2 Q2.2 TP17.TP
EPD_3V3_C [power]: Q2.1 R_CL1.2 TP13.TP U2.18
EPD_BUSY: J1.9 TP9.TP U2.26
EPD_CS: D6.1 J1.12 R9.1 TP10.TP U2.11
EPD_DC: J1.11 TP11.TP U2.5
EPD_RST: J1.10 TP12.TP U2.21
FLASH_CS: D9.1 R5.1 U1.1 U2.12
GDR: J1.2 Q3.1 R4.1
GND: BOOT_BUTTON.1 BOOT_BUTTON.2 C1.2 C1_BAT1.2 C1_BAT2.2 C1_BAT.2 C2.2 C2_BAT.2 C3.- C4_USB.2 C5.2 C5_USB.2 C6.2 C7.2 C8.2 C9.2 C10.2 C10_SUPERCAP.1 C_DELAY.2 CHANGE_BUTTON.1 CHANGE_BUTTON.2 D1.2 D3.1 D6.2 D8.2 D9.2 D10.2 D11.2 D12.2 EPD_C1.2 EPD_C2.2 EPD_C5.2 EPD_C6.2 EPD_C7.2 EPD_C8.2 EPD_C9.2 EPD_C10.2 EPD_C11.2 EPD_C12.2 IC1.3 IC4.2 J1.8 J1.17 J1.MP1 J1.MP2 J2.A1 J2.A12 J2.B1 J2.B12 J2.MP1 J2.MP2 J2.MP3 J2.MP4 J3.1 J4.G1 J4.G2 J4.G3 J4.G4 J4.P6 MCP73831.2 R1_PWRUSB.1 R2-USB1.1 R2-USB.2 R2.1 R2_BAT.1 R4.2 RESET_BUTTON.1 RESET_BUTTON.2 SENSOR2.1 SENSOR2.5 SENSOR2.7 SJ1.1 TP4.TP TP5.TP U1.4 U1.9 U2.1 U2.28 U2.29_1 U2.29_2 U2.29_3 U2.29_4 U2.29_5 U2.29_6 U2.29_7 U2.29_8 U2.29_9 U3.13 U4.1 U4.4 U4.6 U4.9
GPIO8: R1.1 U2.10
I2C_PW: C1.1 C2.1 R1-PINH.2 R2-PINH.2 SENSOR2.2 SENSOR2.6 SENSOR2.8 U2.17
INT_RTC: R1-PINH1.1 TP15.TP U2.8 U3.3
IO/BOOT: BOOT_BUTTON.3 BOOT_BUTTON.4 C6.1 R_BOOT.2 U2.15
IO/CHANGE: C10.1 CHANGE_BUTTON.3 CHANGE_BUTTON.4 R_CAHNGE.2 U2.23
MISO: D12.1 J4.P7 R8.1 TP6.TP U1.2 U2.27
MOSI: D11.1 J1.14 J4.P3 R7.1 TP7.TP U1.5 U2.7
N$1: J2.B5 R2-USB.1
N$2: J2.A5 R2-USB1.2
N$3: C1_BAT1.1 D2.1 IC4.1 IC4.3 Q1.2
N$4: MCP73831.5 R2_BAT.2
N$5: MCP73831.1 R1_BAT.1
N$6: GHG_LED.C R1_BAT.2
N$7: EPD_C12.1 J1.24
N$8: EPD_C10.1 J1.22
N$9: EPD_C8.1 J1.20
N$10: EPD_C7.1 J1.19
N$11: EPD_C6.1 J1.18
N$12: EPD_C2.1 J1.5
N$13: C_DELAY.1 IC1.5
N$14: EPD_C1.1 J1.4
N$15: D7.1 R_CAPACITOR.1
N$16: C4.1 D3.2 D4.1
PREVGH: D5.1 EPD_C9.1 J1.21
PREVGL: D4.2 EPD_C11.1 J1.23
RESE: J1.3 Q3.2 R3.1
RESE': R2.2 R3.2 SJ1.2
RESET: C5.1 IC1.1 R_RESET.2 RESET_BUTTON.3 RESET_BUTTON.4 U2.3
RTC_RST: U2.16 U3.4
RX: TP2.TP U2.24
SCK: D10.1 J1.13 J4.P5 R6.1 TP8.TP U1.6 U2.6
SCL: J3.4 R2-PINH.1 SENSOR2.4 U2.20 U3.16 U4.7
SDA: J3.3 R1-PINH.1 SENSOR2.3 U2.19 U3.15 U4.8
SRC: C4.2 D5.2 L1.1 Q3.3
SS_SD: D8.1 J4.P2 R10.1 U2.4
TX: TP1.TP U2.25
USB_D+: D1.1 U2.14
USB_D-: D1.3 U2.13
VBAT [power]: C2_BAT.1 MCP73831.3 Q1.3 TP3.TP U4.2 U4.3
VBUS [power]: C1_BAT.1 C4_USB.1 C5_USB.1 D1.5 D2.2 GHG_LED.A MCP73831.4 PFMF.050.1.2 Q1.1 R1_PWRUSB.2 TP14.TP
VRTC [power]: C8.1 C10_SUPERCAP.2 R_CAPACITOR.2 U3.14
VUSB [power]: J2.A4 J2.A9 J2.B4 J2.B9 PFMF.050.1.1

## Tracks (layer width: path | path; a pad name or v marks a point on that pad's centre or on a via)
3V3  (via drill 0.3)
  Top 0.3: R_CAHNGE.1 60.28,106.69 53.49,106.69 R_BOOT.1 53.35,106.62 53.35,106.42 47.39,100.46 47.12,100.46 IC1.2 46.98,100.53 v45.87,100.53 | J4.P4 5.22,90.49 5.84,90.49 6.47,91.11 6.47,99.91 C9.1 6.4,100.05 7.99,100.05 9.17,101.22 R10.2 9.31,101.29 14.64,106.62 20.39,106.62 R_RESET.1 20.52,106.56 20.87,106.21 v21.22,106.21 | J3.2 165.19,18.82 153.97,18.82 135.55,37.24 C1_BAT2.1 135.34,37.24 131.6,37.24 130.49,36.13 C3.+ 130.36,36.06 130.22,36.06 127.1,39.18 127.1,39.59 IC4.5 126.96,39.73 v125.09,39.73 | R6.2 31.33,32.18 28.42,32.18 28.21,32.39 R7.2 28,32.39 27.94,32.32 24.47,32.32 R8.2 26.28,34.11 26.58,34.11 26.89,34.42 26.89,34.72 28.36,36.19 | U2.2 8.82,50.32 8.82,49.42 12.63,45.62 18.93,45.62 R1.2 19.07,45.48 28.36,36.19 | 93.31,55.03 93.31,51.29 R1-PINH1.2 93.17,51.16 92.61,51.16 v91.78,50.32 | U3.2 88.6,59.26 88.6,58.84 92.34,55.1 93.17,55.1 93.31,55.03 | U1.7 42.96,61.54 U1.8 42.96,61.68 42.2,61.68 41.72,62.17 37.22,62.17 37.08,62.03 37.08,61.2 35.21,59.33 35.21,59.12 U1.3 35.14,58.98 v35.14,58.43 | Q2.3 80.7,27.54 78.21,27.54 77.66,26.99 76.27,26.99 R_CL1.1 76.13,26.99 v75.51,27.61 | v73.36,27.61 73.92,28.16 74.06,28.16 R5.2 | v51.06,32.04 51.06,35.64 49.96,36.75 TP16.TP 49.82,36.89 49.82,38.55 35,53.37 R9.2 34.86,53.44 v34.1,53.44 | D7.2 92,63.2 94.97,60.23 R2-PINH1.2 95.04,59.19 95.7,58.53 95.7,57.48 93.31,55.09 93.31,55.03 | 28.36,36.19 29.15,36.98 29.15,47.99 v29.62,48.45
  Bottom 0.3: v21.22,106.21 21.36,106.35 40.05,106.35 v45.87,100.53 45.8,100.39 45.8,69.16 35.21,58.57 v35.14,58.43 35.14,54.47 34.79,54.13 34.78,54.13 v34.1,53.44 32.6,54.94 29.62,54.94 v29.62,48.45 | v51.06,32.04 55.43,27.68 73.22,27.68 v73.36,27.61 v75.51,27.61 75.65,27.68 76.83,27.68 79.6,30.45 79.6,38.14 v91.78,50.32 91.92,50.25 92.13,50.25 102.66,39.73 v125.09,39.73
32KHZ
  Top 0.15: R2-PINH1.1 94.97,58.01 91.09,58.01 89.84,59.26 U3.1 89.78,59.33 89.78,59.67 88.88,60.57 88.18,60.57 87.97,60.37 87.97,58.22 85.07,55.31 39.2,55.31 38.95,55.06 33.84,55.06 31.54,52.75 21.98,52.75 20.8,51.57 18.66,51.57 17.76,50.67 17.76,50.39 U2.9
DN
  Top 0.15: 162.94,53.68 162.76,53.86 162.76,54.27 163.04,54.55 J2.A7 | 162.94,53.68 163.04,53.58 163.6,53.58 J2.B7 | 162.94,53.68 161.59,52.33 156.32,52.33 155.84,51.85 155.84,46.1 154.59,44.85 154.59,43.47 155.08,42.98 155.08,41.12 154.59,40.63 154.32,40.63 D1.4
DP
  Top 0.15: J2.A6 163.66,54.06 164.15,54.06 164.43,54.34 164.43,54.76 164.15,55.03 163.66,55.03 J2.B6 163.6,55.03 163.04,55.03 162.49,54.48 162.49,53.65 161.45,52.61 156.19,52.61 155.56,51.99 155.56,46.24 154.32,44.99 154.32,42.5 D1.6
EPD_3V3  (via drill 0.3)
  Top 0.3: J1.15 84.72,14.31 84.31,14.31 J1.16 84.23,14.45 84.23,14.87 83.68,15.42 83.68,15.98 83.82,16.12 v83.82,17.15 | v83.82,18.82 83.82,21.45 EPD_C5.1 | 81.22,26.81 81.53,27.13 81.53,28.23 | 81.22,26.81 81.05,26.64 78.63,26.64 Q2.2 | 81.53,28.23 83.61,30.31 L1.2 | 83.54,25.95 82.09,25.95 81.22,26.81 | 83.54,25.95 90.95,25.95 96.42,31.42 96.42,33.36 C7.1 | v66.16,36.34 61.11,36.34 TP17.TP | v79.04,30.66 81.4,28.3 81.53,28.23 | 83.54,25.95 v83.54,25.46
  Bottom 0.3: v83.82,17.15 v83.82,18.82 83.75,18.95 83.75,23.11 83.54,23.32 v83.54,25.46 | v66.16,36.34 68.86,39.04 70.66,39.04 v79.04,30.66
EPD_3V3_C  (via drill 0.3)
  Top 0.3: Q2.1 78.56,28.51 78.28,28.23 76.27,28.23 R_CL1.2 76.13,28.3 v75.51,28.93 | v23.64,54.13 23.64,63.69 20.25,67.08 U2.18 | v23.64,32.67 22.26,31.28 22.26,19.37 24.82,16.81 TP13.TP
  Bottom 0.3: v23.64,54.13 28.84,54.13 28.84,37.87 v23.64,32.67 23.78,32.6 51.27,32.6 55.15,28.72 60.55,28.72 60.76,28.93 v75.51,28.93
EPD_BUSY  (via drill 0.3)
  Top 0.15: v87.77,19.16 87.77,14.38 J1.9 | v92.41,24.56 92.41,26.09 98.29,31.97 98.29,60.57 89.53,69.33 | 89.53,69.33 84.23,74.63 84.23,91.88 TP9.TP | U2.26 10.14,67.91 10.14,68.12 11.93,69.92 50.55,69.92 52.19,71.56 62.73,71.56 64.96,69.33 89.53,69.33
  Bottom 0.15: v87.77,19.16 87.77,19.92 v92.41,24.56
EPD_CS  (via drill 0.3)
  Top 0.15: v86.31,15.08 86.31,14.38 J1.12 | 42.57,51.34 42.06,51.85 37.98,51.85 D6.1 37.91,51.92 35.83,53.99 34.03,53.99 33.61,53.58 33.61,53.3 | 42.57,51.34 47.57,46.34 v47.6,46.38 | 33.61,53.3 34.79,52.12 34.93,52.12 R9.1 | U2.11 20.25,50.39 20.25,50.6 22.12,52.47 32.71,52.47 33.54,53.3 33.61,53.3 | TP10.TP 61.76,70.32 60.41,68.98 60.41,59.23 v57.3,56.12 | v55.64,25.81 55.33,26.11 55.33,35.09 56.57,36.32 56.57,37.32 55.87,38.02 50.85,38.02 42.57,46.3 42.57,51.34
  Bottom 0.15: v86.31,15.08 86.11,15.08 85.9,14.87 66.58,14.87 v55.64,25.81 | v47.6,46.38 57.3,56.07 v57.3,56.12
EPD_DC  (via drill 0.3)
  Top 0.15: v86.8,15.77 86.8,14.38 J1.11 | v17.41,12.1 12.91,16.6 TP11.TP | v12.63,46.38 12.63,50.32 U2.5
  Bottom 0.15: v86.8,15.77 86.8,19.58 92.41,25.19 92.41,30.45 92.75,30.8 93.03,30.8 93.38,30.45 93.38,15.91 89.57,12.1 v17.41,12.1 17.41,12.17 12.63,16.95 v12.63,46.38
EPD_RST  (via drill 0.3)
  Top 0.15: v87.28,15.08 87.28,14.38 J1.10 | v90.88,15.56 91.44,15.56 92.2,14.8 92.2,13.9 90.88,12.58 v83.13,12.58 | v23.16,12.58 19.21,16.53 TP12.TP 19.21,16.6 19.35,16.74 v19.35,44.37 | v19.35,58.43 19.35,60.51 14.44,65.41 14.44,65.64 15.81,67.02 15.81,67.23 U2.21
  Bottom 0.15: v87.28,15.08 90.4,15.08 v90.88,15.56 | v23.16,12.58 v83.13,12.58 | v19.35,44.37 v19.35,58.43
FLASH_CS  (via drill 0.3)
  Top 0.15: v74.68,26.23 74.12,26.78 74.12,26.92 R5.1 74.07,27.14 74.72,27.8 74.72,34.62 74.65,34.7 65.77,34.7 v60.34,29.27 | v76.62,24.29 77.17,24.29 77.52,23.94 D9.1 | v28.28,60.85 29.04,61.61 35.14,61.61 U1.1 | v22.4,51.5 21.56,50.67 21.56,50.39 U2.12
  Bottom 0.15: v76.62,24.29 v74.68,26.23 | v28.28,60.85 28.28,59.4 23.68,54.79 | 23.68,54.79 22.4,53.51 v22.4,51.5 | v60.34,29.27 55.65,29.27 36.95,47.97 29.5,47.97 29.19,48.28 29.19,54.28 28.99,54.48 23.98,54.48 23.68,54.79
GDR  (via drill 0.3)
  Top 0.15: v91.23,15.08 91.23,14.38 J1.2 | v74.33,14.38 71.28,17.43 R4.1 | v66.72,14.38 65.88,15.22 65.88,17.5 Q3.1
  Bottom 0.15: v91.23,15.08 90.81,15.08 90.12,14.38 v74.33,14.38 v66.72,14.38
GND  (via drill 0.3, 0.35)
  Top 0.15: 37.22,57.87 35.21,57.87 U1.4 35.14,57.8 27.94,57.8 23.78,53.65 23.5,53.65 15.19,61.96 14.92,61.96 14.57,61.61 14.57,58.91 U2.29_9 13.32,58.84 U2.29_6 12.08,58.84 U2.29_3 | 37.22,57.87 39.02,59.67 U1.9 | v37.91,57.11 37.22,57.8 37.22,57.87 | U2.29_1 12.01,57.53 U2.29_2 12.01,57.66 U2.29_3 | U2.29_4 12.08,56.35 U2.29_1 | U2.29_5 13.25,57.53 13.25,56.42 U2.29_4 | U2.29_4 13.32,56.35 U2.29_7 14.5,56.42 14.5,57.53 U2.29_8 | v9.58,52.61 7.58,50.6 7.58,50.39 U2.1 | v12.01,54.34 12.01,56.28 U2.29_1 | U2.29_3 12.01,58.91 7.58,63.34 7.58,67.84 U2.28 7.58,67.91 7.58,77.12 J4.G1 15.75,85.37 15.75,86.4 14.98,87.17 14.98,90.21 15.75,90.98 J4.G2 15.75,91.04 13.32,93.47 D8.2 13.39,98.8 14.43,98.8 22.19,106.56 22.19,106.97 RESET_BUTTON.1 | TP4.TP 83.89,102.54 83.89,106.9 83.96,106.97 TP5.TP 83.82,106.21 68.38,106.21 | 49.75,101.92 51.34,101.92 51.83,101.43 C_DELAY.2 51.97,101.36 56.47,101.36 62.14,107.04 CHANGE_BUTTON.1 65.68,107.11 CHANGE_BUTTON.2 65.75,107.04 66.72,106.07 68.24,106.07 68.38,106.21 | 49.75,101.92 49.4,101.92 49.19,101.71 49.19,101.43 47.26,99.49 47.12,99.49 IC1.3 | 68.38,106.21 68.38,107.11 67.75,107.73 67.75,107.94 C10.2 | RESET_BUTTON.2 26.69,107.94 27.66,107.94 C5.2 27.73,107.94 39.98,107.94 40.5,107.42 | 42.37,105.55 41.3,104.48 41.3,103.72 41.65,103.37 43.52,103.37 47.19,107.04 BOOT_BUTTON.1 47.26,107.11 49.68,107.11 | 42.37,105.55 44.55,107.73 44.55,107.94 C6.2 | 49.68,107.11 50.65,107.11 BOOT_BUTTON.2 | 42.37,105.55 40.5,107.42 | J4.G3 1.55,82.39 1.55,89.59 4.6,92.64 J4.P6 5.15,92.71 4.6,92.71 2.59,94.71 2.59,95.48 J4.G4 2.59,95.55 2.59,97.34 6.33,101.09 6.33,101.29 C9.2 6.4,101.36 8.13,101.36 14.02,107.25 21.84,107.25 22.12,106.97 RESET_BUTTON.1
  Top 0.15: 40.5,107.42 38.39,105.31 23.5,105.31 22.26,106.56 RESET_BUTTON.1 | 49.68,107.11 v49.68,106.35 | v49.75,102.05 49.75,101.92 | 128.42,49.08 125.37,46.03 125.23,46.03 R2_BAT.1 125.16,46.03 123.57,46.03 119.55,50.05 119.55,51.36 C1_BAT.2 | 128.42,49.08 128.42,49.84 127.86,50.39 127.59,50.39 MCP73831.2 127.52,50.46 127.31,50.46 126.75,51.02 126.75,51.71 129.18,54.13 C2_BAT.2 | U4.1 136.24,54.13 136.66,54.13 137.14,53.65 137.14,53.44 U4.9 | U4.9 137.14,53.37 137.14,53.23 136.66,52.75 136.24,52.75 U4.4 136.1,52.68 136.1,48.87 134.16,46.93 133.19,46.93 131.05,49.08 128.42,49.08 | U4.9 137.21,53.23 138.11,53.23 U4.6 138.18,53.16 138.46,53.16 147.39,44.23 147.39,42.91 | 147.39,42.91 147.39,42.29 R2-USB.2 | C1.2 158.54,7.18 157.29,7.18 C2.2 157.71,7.25 157.71,9.95 SENSOR2.5 157.64,10.02 157.64,10.23 157.16,10.71 | 157.16,10.71 156.53,10.71 156.12,10.3 156.12,10.02 SENSOR2.7 | 158.12,13.48 157.99,13.62 155.77,13.62 155.29,13.14 155.29,12.93 SENSOR2.1 | 158.12,13.48 158.12,11.75 157.16,10.78 157.16,10.71 | 158.12,13.48 158.19,13.48 162.42,17.71 165.19,17.71 J3.1 165.26,17.78 165.53,17.78 166.16,18.4 166.16,22.42 155.22,33.36 155.22,33.43 | J2.B12 163.6,51.23 163.6,51.02 J2.A1 163.6,50.88 163.6,49.98 164.36,49.22 J2.MP3 | 166.37,49.22 164.43,49.22 J2.MP3 | 166.37,49.22 168.31,49.22 J2.MP1 | J2.B1 163.6,57.39 163.6,57.6 J2.A12 163.66,57.66 163.66,58.7 164.36,59.4 J2.MP4 164.43,59.47 166.37,59.47 | 166.37,59.47 168.31,59.47 J2.MP2 | 166.37,59.47 166.37,49.22 | C5_USB.2 154.32,39.11 154.32,38 C4_USB.2 154.39,38 154.66,38 155.35,37.31 155.35,33.57 155.22,33.43
  Top 0.15: v155.08,43.61 156.12,43.61 R2-USB1.1 | v153.07,41.6 151.75,41.6 D1.2 151.69,41.53 151.48,41.53 150.92,40.98 150.92,40.21 151.06,40.08 153.14,40.08 154.04,39.18 154.25,39.18 C5_USB.2 | 155.22,33.43 149.05,33.43 143.93,38.55 135.48,38.55 C1_BAT2.2 135.34,38.62 130.84,38.62 130.43,39.04 C3.- 130.36,39.04 v128,39.04 | J2.MP3 164.36,49.15 164.36,48.94 154.39,38.97 C5_USB.2 | v148.98,42.91 147.39,42.91 | EPD_C11.2 72.12,21.52 69.97,21.52 EPD_C12.2 69.9,21.52 69.28,20.89 69.28,19.79 69.9,19.16 69.9,17.5 R4.2 69.97,17.43 69.97,11.75 | 69.97,11.75 69.9,11.75 68.24,10.09 R2.1 68.17,10.02 67.61,9.47 64.36,9.47 63.53,10.3 63.53,10.44 SJ1.1 63.46,10.51 47.05,26.92 31.6,26.92 D10.2 31.54,26.92 29.11,26.92 28.9,26.71 28.14,26.71 D11.2 28,26.78 24.61,26.78 D12.2 24.61,26.85 v23.71,27.75 | 69.97,11.75 79.25,11.75 J1.MP2 79.32,11.75 92.75,11.75 J1.MP1 92.75,11.82 92.75,21.03 | U3.13 85.97,49.98 85.76,49.77 85.76,46.59 C8.2 85.83,46.59 86.52,45.89 v91.85,45.89 | J1.17 83.82,14.31 83.82,13.9 84.03,13.69 88.04,13.69 88.25,13.9 88.25,14.31 J1.8 88.25,14.38 88.25,19.3 v86.87,20.69 | EPD_C6.2 85.27,22.76 83.89,22.76 EPD_C5.2 84.1,22.83 v84.1,23.52 | EPD_C8.2 88.18,22.76 86.87,22.76 EPD_C7.2 86.87,22.83 85.41,24.29 83.82,24.29 82.36,22.83 EPD_C2.2 82.3,22.83 80.98,22.83 EPD_C1.2 80.98,22.9 80.77,23.11 v80.77,23.52 | v79.87,23.87 79.04,23.87 D9.2 | v86.87,29.48 D3.1 | v91.92,49.7 92.75,50.53 93.65,50.53 94.83,51.71 97.05,51.71 C10_SUPERCAP.1 | 124.95,38.14 124.4,38.69 124.26,38.69 IC4.2 | 124.95,38.14 124.95,36.48 123.36,34.88 122.39,34.88 121.7,35.57 C1_BAT1.2 121.63,35.64 118.93,38.34 R1_PWRUSB.1 118.86,38.34 110.14,38.34 92.82,21.03 92.75,21.03
  Top 0.15: 92.75,21.03 91.16,22.62 EPD_C10.2 91.16,22.69 89.91,23.94 | 89.91,23.94 89.5,23.94 89.15,23.59 89.15,23.32 89.22,23.25 89.22,23.18 89.64,22.76 EPD_C9.2 | 89.91,23.94 89.91,24.01 97.12,31.21 97.12,33.84 96.49,34.47 96.49,34.67 C7.2 96.42,34.74 v95.59,34.74 | v125.92,39.04 125.02,38.14 124.95,38.14 | D6.2 37.91,53.43 v37.91,54.35
  Bottom 0.15: 10.28,52.61 v9.58,52.61 | v12.01,54.34 10.28,52.61 | v49.75,102.05 49.75,106.28 v49.68,106.35 | v155.08,43.61 v153.07,41.6 153,41.6 151.69,42.91 v148.98,42.91 | v79.87,23.87 80.43,23.87 v80.77,23.52 80.91,23.52 83.51,26.12 | 83.51,26.12 v86.87,29.48 86.87,29.55 91.92,34.6 91.92,34.74 | 91.92,34.74 91.92,45.89 | 91.92,45.89 v91.92,49.7 | 83.51,26.12 84.1,25.53 v84.1,23.52 84.1,23.46 v86.87,20.69 | v91.85,45.89 91.92,45.89 | v95.59,34.74 91.92,34.74 | v125.92,39.04 v128,39.04 | 10.28,52.61 10.28,49.35 13.18,46.45 13.18,38.27 v23.71,27.75 | v37.91,57.11 v37.91,54.35
  other vias: 71.5,58.9 71.5,31.3 31.8,43.8
  pour Top: 6.06,50.06 6.04,50.04 6.02,50.02 0.08,50.02 0.08,0.08 76.92,0.08 76.92,10.02 76.94,10.04 76.96,10.06 76.98,10.08 95.22,10.08 95.24,10.06 95.26,10.04 95.28,10.02 95.28,0.08 170.12,0.08 170.12,67.12 92.18,67.12 92.16,67.14 92.14,67.16 92.12,67.18 92.12,111.12 69.08,111.12 69.08,109.38 69.06,109.36 69.04,109.34 69.02,109.32 19.28,109.32 19.26,109.34 19.24,109.36 19.22,109.38 19.22,111.12 0.08,111.12 0.08,68.18 6.02,68.18 6.04,68.16 6.06,68.14 6.08,68.12 6.08,50.08
  pour Bottom: 6.06,50.06 6.04,50.04 6.02,50.02 0.08,50.02 0.08,0.08 76.92,0.08 76.92,10.02 76.94,10.04 76.96,10.06 76.98,10.08 95.22,10.08 95.24,10.06 95.26,10.04 95.28,10.02 95.28,0.08 170.12,0.08 170.12,67.12 92.18,67.12 92.16,67.14 92.14,67.16 92.12,67.18 92.12,111.12 69.08,111.12 69.08,109.38 69.06,109.36 69.04,109.34 69.02,109.32 19.28,109.32 19.26,109.34 19.24,109.36 19.22,109.38 19.22,111.12 0.08,111.12 0.08,68.18 6.02,68.18 6.04,68.16 6.06,68.14 6.08,68.12 6.08,50.08
GPIO8
  Top 0.15: R1.1 19,46.93 19,50.32 U2.10
I2C_PW  (via drill 0.3)
  Top 0.15: C1.1 158.54,5.87 157.29,5.87 C2.1 157.22,5.87 155.98,7.11 R1-PINH.2 155.91,7.18 155.29,7.18 | 155.29,7.18 154.66,7.18 R2-PINH.2 | 155.29,7.18 155.29,9.26 | 155.29,9.26 155.29,9.95 SENSOR2.8 | 155.29,9.26 156.39,9.26 156.81,9.67 156.81,9.95 SENSOR2.6 | SENSOR2.2 156.05,12.86 156.05,10.99 155.29,10.23 155.29,10.02 SENSOR2.8 | v24.2,58.08 24.2,65.84 23.16,66.88 22.26,66.88 21.56,67.57 21.56,67.84 U2.17 | v21.91,41.81 21.91,32.87 21.84,32.8 21.84,18.05 30.7,9.19 75.65,9.19 76.83,10.37 155.08,10.37 155.22,10.23 SENSOR2.8
  Bottom 0.15: v24.2,58.08 21.91,55.79 v21.91,41.81
INT_RTC
  Top 0.15: 97.88,50.81 96.63,50.81 95.8,49.98 93.31,49.98 R1-PINH1.1 | 97.88,50.81 98.02,50.95 98.02,59.98 92.2,65.8 89.94,65.8 87.28,63.14 87.28,59.33 U3.3 | 55.01,27.75 54.73,27.75 33.54,48.94 29.04,48.94 26.41,46.31 18.45,46.31 16.44,48.32 16.44,50.32 U2.8 | 97.88,50.81 97.88,50.46 98.02,50.32 98.02,48.73 88.66,39.37 81.21,39.37 76.81,34.97 65.42,34.97 55.77,25.32 55.5,25.32 55.01,25.81 55.01,27.75 | 55.01,27.75 55.06,27.8 55.06,36.51 TP15.TP
IO/BOOT  (via drill 0.3)
  Top 0.15: R_BOOT.2 53.35,108.01 51.27,108.01 50.72,108.56 BOOT_BUTTON.3 50.65,108.56 47.26,108.56 BOOT_BUTTON.4 47.19,108.63 45.25,106.69 44.62,106.69 C6.1 44.55,106.62 v41.78,103.86 | v35.9,62.1 32.09,62.1 26.34,67.84 U2.15
  Bottom 0.15: v35.9,62.1 35.9,97.97 v41.78,103.86
IO/CHANGE  (via drill 0.3)
  Top 0.15: C10.1 67.68,106.69 65.75,108.63 CHANGE_BUTTON.3 65.68,108.63 62.21,108.63 CHANGE_BUTTON.4 62.14,108.56 61.59,108.01 60.34,108.01 R_CAHNGE.2 60.28,107.94 59.72,107.39 53,107.39 51.97,106.35 50.3,106.35 26.34,82.39 v26.34,81.97 | U2.23 13.95,67.9 v13.95,68.93
  Bottom 0.15: v26.34,81.97 13.95,69.58 v13.95,68.93
MISO  (via drill 0.3)
  Top 0.15: D12.1 24.54,28.3 24.47,28.37 24.47,30.93 R8.1 24.4,31 v22.81,31 | v24.68,60.37 35.14,60.37 U1.2 | v18.86,60.37 12.35,66.88 9.52,66.88 8.82,67.57 8.82,67.84 U2.27 | v4.25,93.68 5.36,93.68 J4.P7 | v8.06,69.02 8.06,68.88 8.75,68.19 8.75,67.91 U2.27 | TP6.TP 84.17,97.21 42.2,97.21 19.9,74.91 15.54,74.91 8.82,68.19 U2.27
  Bottom 0.15: v24.68,60.37 v18.86,60.37 18.86,60.3 13.46,54.9 13.46,40.08 22.53,31 v22.81,31 | v4.25,93.68 4.25,92.15 3.77,91.67 3.77,73.32 v8.06,69.02
MOSI  (via drill 0.3)
  Top 0.15: v84.23,15.77 85.27,14.73 85.27,14.38 J1.14 | v28.9,27.33 28.07,28.16 D11.1 28.07,28.3 28.07,31.07 R7.1 | v6.54,89.31 5.43,89.31 J4.P3 | v24.2,89.31 27.24,86.27 TP7.TP | 17.62,53.03 23.57,53.03 25.88,55.33 38.83,55.33 41.3,57.8 42.96,57.8 U1.5 | 17.62,53.03 15.19,50.6 15.19,50.39 U2.7 15.19,50.32 v15.19,49.22 | v15.05,61.47 15.05,59.4 17.62,56.83 17.62,53.03
  Bottom 0.15: v84.23,15.77 66.3,15.77 54.73,27.33 v28.9,27.33 27.1,27.33 22.53,31.9 22.05,31.9 15.19,38.76 v15.19,49.22 | v24.2,89.31 13.46,89.31 | 13.46,89.31 v6.54,89.31 | 13.46,89.31 13.46,63.07 v15.05,61.47
N$1
  Top 0.15: R2-USB.1 147.46,41.05 147.74,41.05 155.29,48.59 155.29,52.12 159.16,56 163.6,56 J2.B5
N$2
  Top 0.15: R2-USB1.2 156.19,44.99 156.19,46.17 163.04,53.03 163.6,53.03 J2.A5
N$3
  Top 0.15: 123.01,36.54 123.01,35.64 C1_BAT1.1 | 123.01,36.54 124.19,37.72 IC4.3 124.12,37.72 123.57,38.27 123.57,39.11 124.05,39.59 124.19,39.59 IC4.1 124.33,39.66 124.88,40.21 128.62,40.21 133.89,45.48 134.58,45.48 Q1.2 | D2.1 121.63,37.86 122.95,36.54 123.01,36.54
N$4
  Top 0.15: R2_BAT.2 125.16,47.35 125.16,49.29 125.02,49.42 MCP73831.5
N$5
  Top 0.15: R1_BAT.1 121.35,49.35 121.56,49.35 122.18,48.73 123.08,48.73 124.12,49.77 124.12,49.84 124.26,49.98 126.82,49.98 127.31,49.49 127.52,49.49 MCP73831.1
N$6
  Top 0.15: GHG_LED.C 121.56,51.43 121.56,50.46 122.6,49.42 R1_BAT.2
N$7
  Top 0.15: J1.24 80.22,14.38 75.79,14.38 69.97,20.2 EPD_C12.1
N$8
  Top 0.15: J1.22 81.33,14.31 81.33,13.76 83.06,12.03 90.75,12.03 92.48,13.76 92.48,20.06 91.16,21.38 EPD_C10.1
N$9
  Top 0.15: J1.20 82.3,14.38 82.3,20.34 83.13,21.17 83.13,23.18 83.96,24.01 85.2,24.01 86.17,23.04 86.17,22.28 86.45,22 87.63,22 88.18,21.45 EPD_C8.1
N$10
  Top 0.15: J1.19 82.78,14.38 82.78,17.15 84.65,19.02 84.65,21.86 84.86,22.07 85.97,22.07 86.59,21.45 86.8,21.45 EPD_C7.1
N$11
  Top 0.15: J1.18 83.27,14.38 83.27,17.22 85.27,19.23 85.27,21.45 EPD_C6.1
N$12
  Top 0.15: J1.5 89.78,14.38 89.78,20.13 88.94,20.96 88.94,23.11 87.21,24.84 78.69,24.84 78.28,24.42 78.28,23.04 80.36,20.96 81.81,20.96 82.3,21.45 EPD_C2.1
N$13
  Top 0.15: IC1.5 49.96,101.29 50.65,101.29 51.83,100.12 C_DELAY.1
N$14  (via drill 0.3)
  Top 0.15: v89.64,23.46 89.98,23.46 90.4,23.04 90.4,20.55 90.33,20.48 90.33,14.38 J1.4 | v87.14,23.46 86.66,23.46 85.55,24.56 81.19,24.56 80.29,23.66 80.29,22.21 80.91,21.59 EPD_C1.1
  Bottom 0.15: v87.14,23.46 v89.64,23.46
N$15
  Top 0.15: D7.1 88.53,63.14 88.53,61.68 88.67,61.54 R_CAPACITOR.1
N$16
  Top 0.15: C4.1 82.3,27.06 82.44,27.06 83.13,26.36 89.91,26.36 93.03,29.48 D3.2 93.03,29.55 92.41,30.17 92.41,31.77 85.41,38.76 D4.1
N$18  (via drill 0.35)
  other vias: 65.8,62.8
N$19  (via drill 0.35)
  other vias: 71.5,62.8
N$21  (via drill 0.35)
  other vias: 66.8,31
N$23  (via drill 0.35)
  other vias: 71.4,35.43
N$24  (via drill 0.35)
  other vias: 26.36,34.64
N$25  (via drill 0.35)
  other vias: 31.6,35.2
PREVGH  (via drill 0.3)
  Top 0.15: v82.16,13.55 81.81,13.9 81.81,14.31 J1.21 | v89.91,20.69 89.91,21.17 89.71,21.38 EPD_C9.1 | v92.89,30.31 93.17,30.59 93.17,33.08 D5.1
  Bottom 0.15: v82.16,13.55 90.33,13.55 91.71,14.94 91.71,18.88 v89.91,20.69 89.91,20.76 92.89,23.73 v92.89,30.31
PREVGL
  Top 0.15: 75.16,20.13 72.19,20.13 EPD_C11.1 | 75.16,20.13 75.37,20.13 80.77,14.73 80.77,14.38 J1.23 | D4.2 75.44,32.34 75.44,31.47 75.03,31.06 75.03,26.5 75.16,26.36 75.16,20.13
RESE  (via drill 0.3)
  Top 0.15: v89.91,13.07 90.75,13.9 90.75,14.31 J1.3 | R3.1 64.98,12.65 65.4,13.07 v65.68,13.07 66.02,13.07 67.2,14.25 67.2,17.5 Q3.2
  Bottom 0.15: v65.68,13.07 v89.91,13.07
RESE'
  Top 0.15: 65.4,10.85 SJ1.2 65.4,10.85 | 65.4,10.85 65.88,11.34 68.17,11.34 R2.2 | 65.4,10.85 63.67,12.58 R3.2
RESET  (via drill 0.3)
  Top 0.15: R_RESET.2 20.46,108.01 21.77,108.01 22.19,108.43 RESET_BUTTON.4 22.26,108.43 23.85,108.43 24.68,107.59 24.75,107.59 | 26.48,106.21 26.9,106.62 27.66,106.62 C5.1 27.73,106.69 28.49,107.46 v39.85,107.46 | 26.48,106.21 24.96,106.21 24.75,106.42 24.75,107.59 | 24.75,107.59 25.65,108.5 RESET_BUTTON.3 | v45.94,101.36 47.05,101.36 IC1.1 | v10.14,53.09 10.14,50.39 U2.3 | v26.83,105.79 26.48,106.14 26.48,106.21
  Bottom 0.15: v39.85,107.46 v45.94,101.36 | v10.14,53.09 10.14,55.93 26.83,72.62 v26.83,105.79
RTC_RST
  Top 0.15: U2.16 22.81,67.91 22.81,68.12 23.5,68.82 25.79,68.82 32.02,62.58 41.85,62.58 42.34,62.1 50.65,62.1 57.06,55.69 85.03,55.69 85.97,56.63 85.97,59.26 U3.4
RX
  Top 0.15: U2.24 12.63,67.91 12.63,68.22 13.77,69.36 51.9,69.36 52.17,69.09 55.91,69.09 57.16,70.34 TP2.TP
SCK  (via drill 0.3)
  Top 0.15: v4.25,91.53 5.36,91.53 J4.P5 | v25.58,91.53 26.83,91.53 TP8.TP | v85.76,15.35 85.76,14.38 J1.13 | v32.44,27.82 32.16,27.82 31.6,28.37 D10.1 31.54,28.44 31.4,28.58 31.4,30.8 R6.1 31.37,31.03 32.02,31.69 32.02,32.55 29.51,35.07 29.51,44.55 v33.41,48.45 | v42.2,58.29 42.96,59.05 U1.6 | v15.68,46.17 13.95,47.9 13.95,50.32 U2.6 13.88,50.39 13.88,50.6 v9.65,54.83
  Bottom 0.15: v25.58,91.53 6.05,91.53 | 6.05,91.53 v4.25,91.53 | v85.76,15.35 85.62,15.35 84.31,16.67 65.81,16.67 54.67,27.82 v32.44,27.82 32.37,27.82 28,32.18 22.19,32.18 15.68,38.69 v15.68,46.17 | v33.41,48.45 33.41,50.05 35.69,52.33 36.49,52.33 38.34,54.17 38.34,54.42 v42.2,58.29 | 6.05,91.53 6.05,71.65 9.65,68.05 v9.65,54.83
SCL  (via drill 0.3)
  Top 0.15: v145.18,53.65 138.18,53.65 U4.7 | v164.15,21.86 165.19,20.82 J3.4 | v153.97,6.49 154.59,5.87 R2-PINH.1 | v157.64,12.03 157.64,12.86 SENSOR2.4 | v23.09,62.24 17.76,67.57 17.76,67.84 U2.20 | 89.33,50.84 89.78,50.39 89.78,50.05 U3.16 | 89.33,50.84 88.25,51.92 60,51.92 57.14,54.78 34.73,54.78 v34.58,54.63 | 89.33,50.84 v90.33,51.85
  Bottom 0.15: v153.97,6.49 153.97,11.61 156.01,13.66 | 156.01,13.66 164.15,21.79 v164.15,21.86 164.15,35.16 145.66,53.65 v145.18,53.65 127.52,53.65 114.57,40.7 103.56,40.7 92.41,51.85 v90.33,51.85 | 156.01,13.66 v157.64,12.03 | v34.58,54.63 34.58,55.15 27.5,62.24 v23.09,62.24
SDA  (via drill 0.3)
  Top 0.15: v145.59,54.13 138.18,54.13 U4.8 | v164.15,20.55 164.91,19.79 165.19,19.79 J3.3 | v155.98,5.1 155.98,5.8 R1-PINH.1 | v156.88,11.96 156.88,12.86 SENSOR2.3 | v20.73,65.84 19,67.57 19,67.84 U2.19 | v87.42,51.43 88.53,50.32 88.53,50.05 U3.15 | v45.04,65.69 44.9,65.84 v34.51,65.84
  Bottom 0.15: v155.98,5.1 155.98,9.74 157.54,11.3 | 157.54,11.3 164.15,17.92 v164.15,20.55 164.63,21.03 164.63,35.09 v145.59,54.13 137.69,62.03 102.79,62.03 93.02,52.26 90.54,52.26 89.43,53.37 87.49,51.43 v87.42,51.43 87.42,65.69 v45.04,65.69 | 157.54,11.3 v156.88,11.96 | v34.51,65.84 v20.73,65.84
SRC  (via drill 0.3)
  Top 0.15: 87.66,30.9 89.64,32.87 89.64,33.08 D5.2 | 87.66,30.9 83.89,27.13 83.54,27.13 C4.2 83.47,27.13 v82.85,27.75 | v68.79,19.65 66.58,19.65 Q3.3 | 87.66,30.9 83.68,34.88 L1.1
  Bottom 0.15: v68.79,19.65 73.22,19.65 81.33,27.75 v82.85,27.75
SS_SD
  Top 0.15: D8.1 11.8,98.87 10.69,99.98 9.24,99.98 R10.1 9.17,99.91 9.17,91.32 6.12,88.27 5.84,88.27 J4.P2 6.12,88.21 6.4,87.93 6.4,57.46 11.32,52.54 11.32,50.39 U2.4
TX
  Top 0.15: U2.25 11.38,67.91 11.38,68.1 12.93,69.64 51.97,69.64 TP1.TP
USB_D+  (via drill 0.3)
  Top 0.15: v150.44,42.43 151.69,42.43 D1.1 | U2.14 24.06,50.32 32.58,50.32 36.77,46.13 v39.4,46.13
  Bottom 0.15: v150.44,42.43 116.71,42.43 114.71,40.42 103.28,40.42 92.89,50.81 52.66,50.81 43.69,41.84 v39.4,46.13
USB_D-  (via drill 0.3)
  Top 0.15: v157.5,42.85 157.5,42.5 155.08,40.08 153.55,40.08 153.07,40.56 151.75,40.56 D1.3 | v32.85,51.36 23.57,51.36 22.81,50.6 22.81,50.39 U2.13
  Bottom 0.15: v157.5,42.85 134.23,66.12 44.7,66.12 35.55,56.97 35.55,54.06 v32.85,51.36
VBAT
  Top 0.3: 133.58,50.98 131.74,52.82 C2_BAT.1 131.53,52.82 130.15,51.43 127.59,51.43 MCP73831.3 | 133.58,50.98 133.68,50.88 133.68,47.62 Q1.3 | 133.58,50.98 135.76,53.16 136.03,53.16 U4.3 136.17,53.23 136.17,53.65 U4.2 136.03,53.72 135.76,53.72 135.55,53.93 135.55,54.41 140.6,59.47 140.95,59.47 TP3.TP
VBUS
  Top 0.3: TP14.TP 140.95,63 136.59,63 125.09,51.5 MCP73831.4 124.95,51.43 123.08,51.43 GHG_LED.A 122.95,51.57 122.32,52.19 119.07,52.19 118.31,51.43 C1_BAT.1 118.38,51.29 118.38,50.67 125.34,43.71 | 149.88,40.7 149.88,42.64 150.37,43.12 152.45,43.12 152.65,42.91 152.65,42.78 153.83,41.6 154.25,41.6 D1.5 | 149.88,40.7 151.34,39.24 152.86,39.24 C5_USB.1 153,39.11 153,38 C4_USB.1 153.07,37.86 154.32,36.61 154.32,35.5 PFMF.050.1.2 | R1_PWRUSB.2 118.93,39.73 121.35,39.73 121.56,39.94 D2.2 121.7,40.08 125.34,43.71 | 125.34,43.71 127.1,45.48 132.71,45.48 Q1.1 132.85,45.55 133.54,46.24 135.13,46.24 141.02,40.35 148.01,40.35 148.29,40.63 149.75,40.63 149.88,40.7
VRTC  (via drill 0.3)
  Top 0.3: 87,48.66 87,49.77 87.21,49.98 U3.14 | 87,48.66 C8.1 | v90.67,60.85 90.05,61.47 R_CAPACITOR.2 | v90.67,52.75 90.67,52.26 90.88,52.06 90.88,49.35 | 90.88,49.35 90.19,48.66 87,48.66 | C10_SUPERCAP.2 97.05,49.49 94.07,49.49 93.72,49.15 91.16,49.15 91.02,49.29 90.88,49.35
  Bottom 0.3: v90.67,52.75 v90.67,60.85
VUSB  (via drill 0.3)
  Top 0.3: J2.A9 163.6,56.83 J2.B4 163.73,56.49 164.29,56.49 164.84,55.93 164.84,52.61 164.29,52.06 163.73,52.06 J2.B9 163.6,51.99 163.6,51.78 J2.A4 163.46,51.71 162.9,51.71 156.95,45.75 156.95,42.57 v155.56,41.18 | v150.99,36.61 149.88,35.5 PFMF.050.1.1
  Bottom 0.3: v150.99,36.61 v155.56,41.18